# Altium PCB HF_Charger.PcbDoc
Units mil, origin at the board's own origin, x right, y up, seen from the top; angles counter-clockwise.
Board outline 11811.02 x 7874.02 mil, 2 copper layers (Top Layer, Bottom Layer); 114 components, 62 nets, 391 pads, 4 vias.
Unrouted connection lines stored in the file: 177.
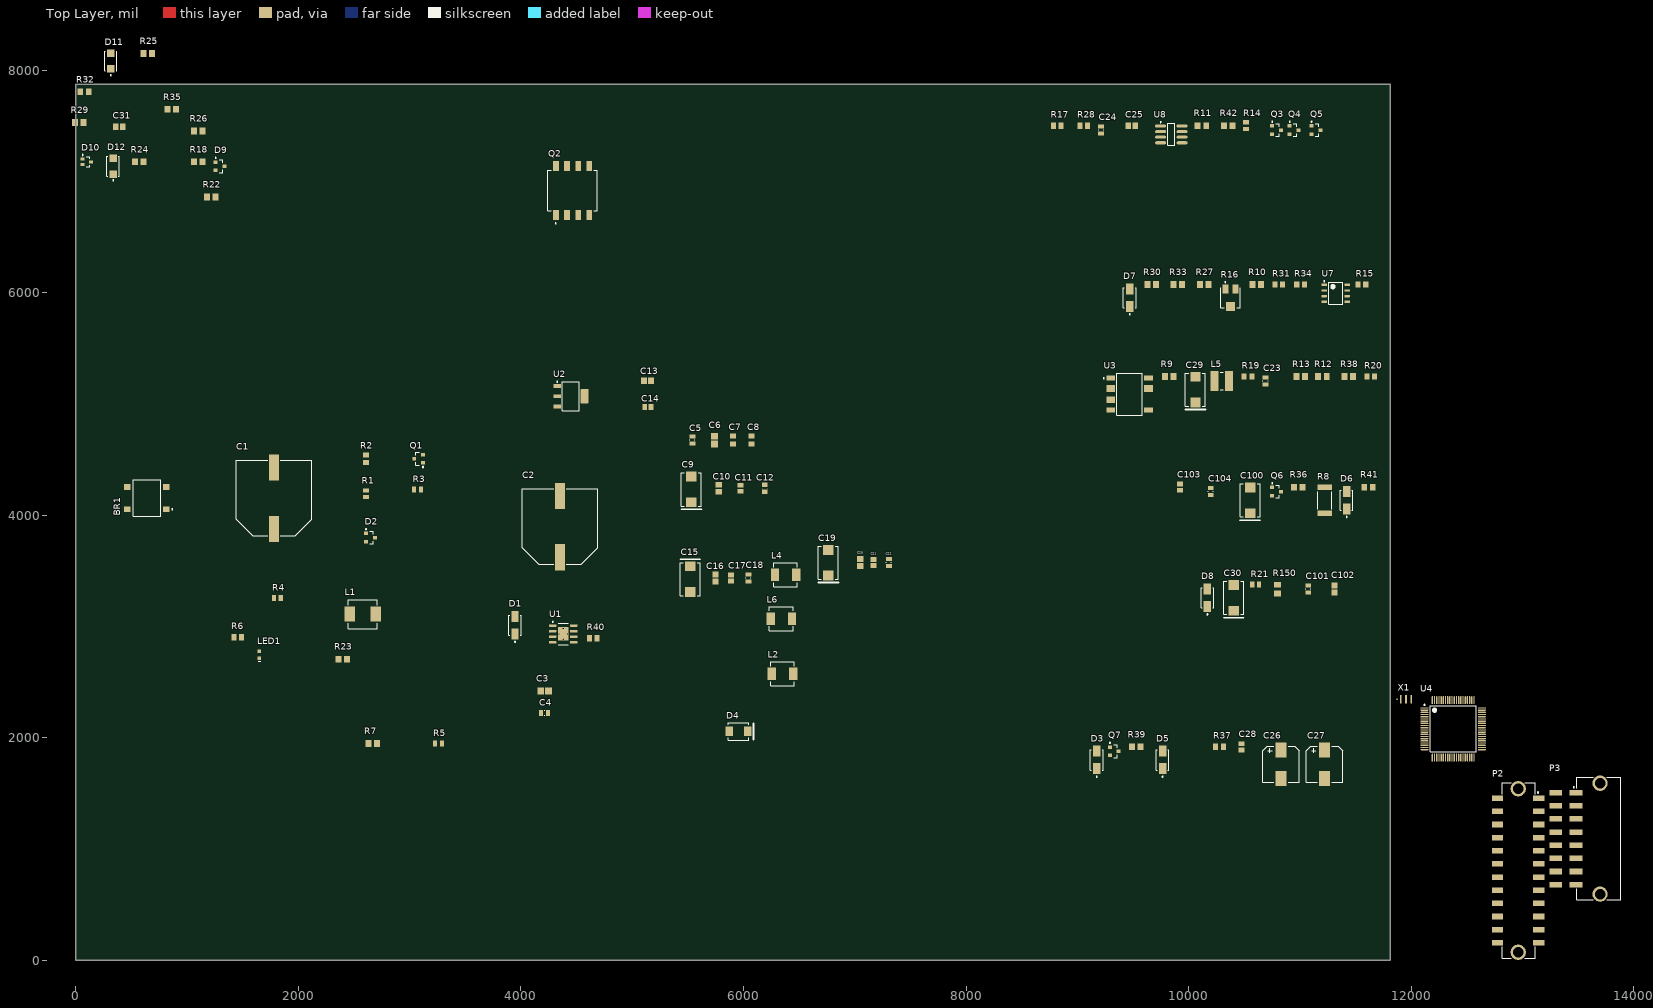
[diagram p0: Top Layer view]
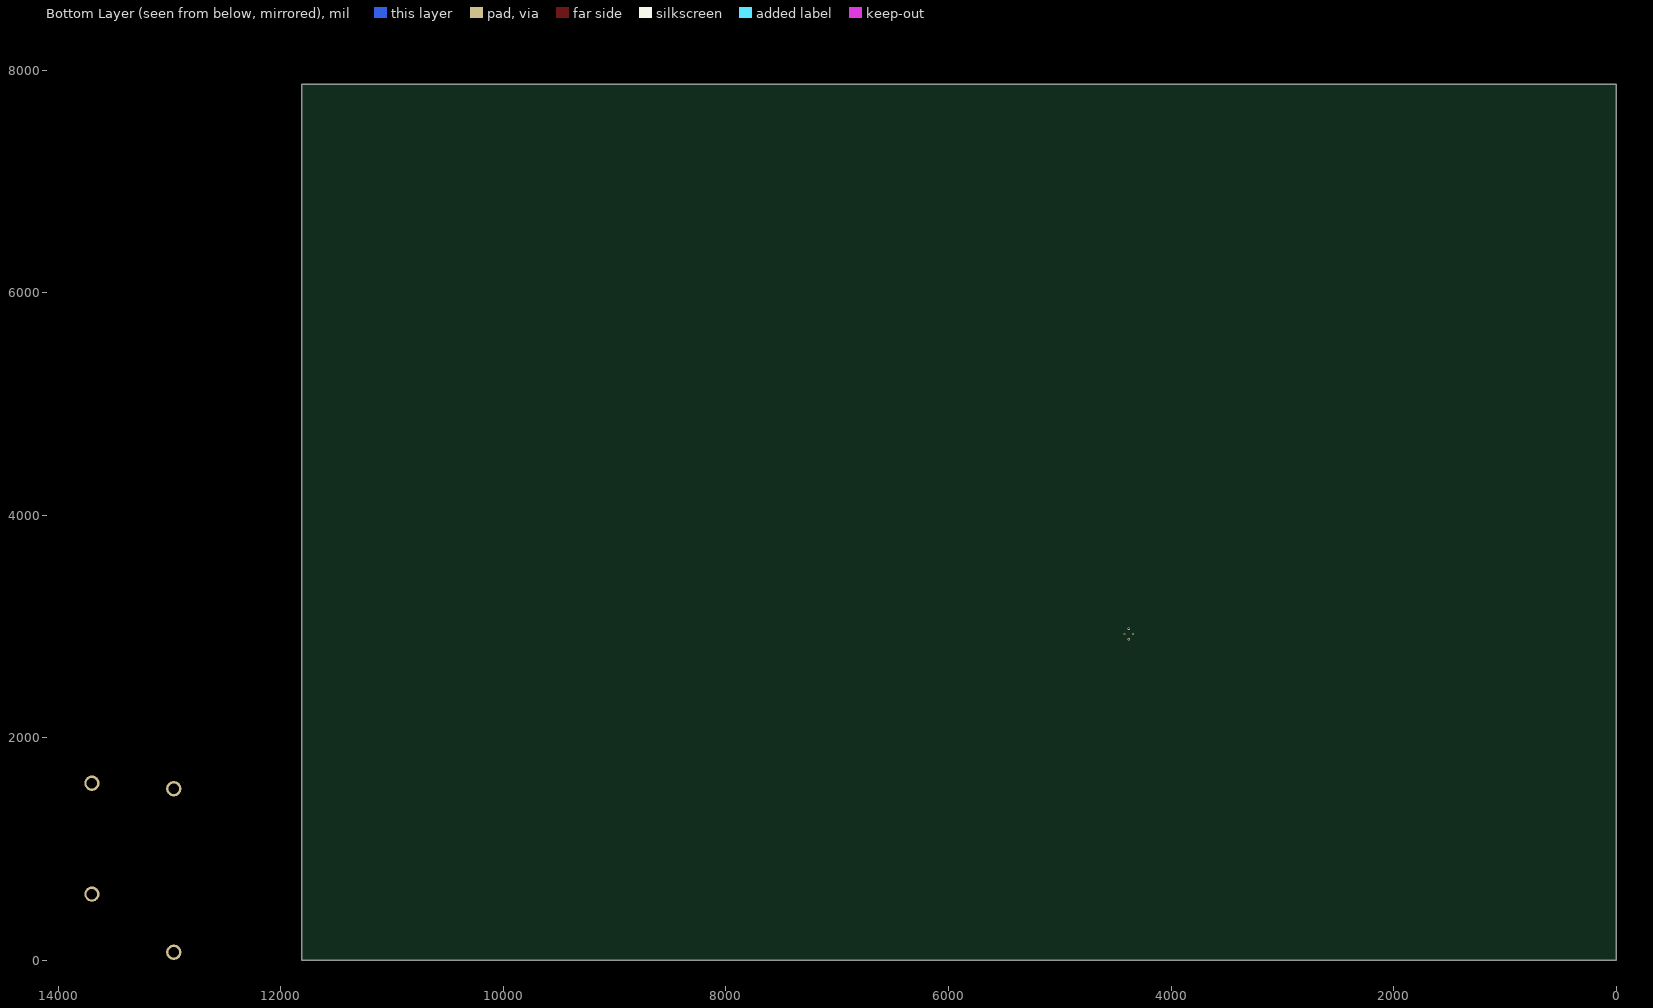
[diagram p1: Bottom Layer view, seen from below]

## Layer stack, top to bottom
Top Solder: solder mask 0.4, Solder Resist, Dk 3.5
Top Layer: signal copper 1.4
Dielectric 1: dielectric 12.6, FR-4, Dk 4.8
Bottom Layer: signal copper 1.4
Bottom Solder: solder mask 0.4, Solder Resist, Dk 3.5

## Board outline
0,0 11811.02,0 11811.02,7874.02 0,7874.02

## Design rules (kind name [scope] priority, off if disabled: settings)
Clearance [All] p1: gap=10 ignorepadtopadclearanceinfootprint=FALSE except(0: Arc-Hole Track-Hole SMDPad-Hole THPad-Hole Via-Hole Fill-Hole Poly-Hole Region-Hole Text-Hole)
PolygonConnect [All] p1: connectstyle=Relief reliefconductorwidth=10 reliefentries=4 polygonreliefangle="90 Angle" airgapwidth=10
RoomDefinition uprocessor [InComponentClass('uprocessor')] p1: confinementstyle=ConfineIn formatcopy=TRUE lockcomponents=FALSE outline 11854.31,1765.74 12690.92,1765.74 12690.92,2503.93 11854.31,2503.93
RoomDefinition power [InComponentClass('power')] p2: confinementstyle=ConfineIn formatcopy=TRUE lockcomponents=FALSE outline 11864.15,-35.43 12366.11,-35.43 12366.11,1716.53 11864.15,1716.53
RoutingVias [All] p1: holewidth=28 width=50 viastyle="Through Hole" minholewidth=28 minwidth=50 maxholewidth=28 maxwidth=50
SolderMaskExpansion [All] p1: expansion=4 istentingtop=FALSE
Width [All] p1: maxlimit=10 minlimit=10 preferedwidth=10
30 further rules are at their usual default settings.

## Classes and differential pairs
component class uprocessor: U4 X1

## Components (designator, comment, footprint, x,y, rotation, side; value= is the part's Value field where it differs from the comment)
BR1 "DF10S" FAIR-SDIP-4_V 639.76,4153.54 r90 top
C1 "470uF" PNSC-EEV-FK1J471M_L 1781.5,4153.54 r90 top
C2 "470uF" PNSC-EEV-FK1J471M_L 4350.39,3897.64 r90 top
C3 "220pF" CAPC2013X140X50ML20T25 4212.6,2421.26 r0 top
C4 "33nF" CAPC0805(2012)100_L 4212.6,2224.41 r0 top
C5 "33n" CAPC0805(2012)100_L 5541.34,4675.2 r270 top value=33nF
C6 "220p" CAPC2013X140X50ML20T25 5738.19,4675.2 r270 top
C7 "220u" CAPC2013X120X55NL10T10 5905.51,4675.2 r270 top
C8 "220u" CAPC2013X120X55NL10T10 6072.83,4675.2 r270 top
C9 "100u" KEMT-T495-D_L 5531.5,4232.28 r90 top
C10 "100n" CAPC2013X88X50NL20T25 5777.56,4242.13 r270 top
C11 "10n" CAPC2013X140X50LL20T25 5974.41,4242.13 r270 top
C12 "1n" CAPC0805(2012)145_L 6190.94,4242.13 r270 top value=1nF
C13 "100n" CAPC2013X88X50NL20T25 5137.8,5206.69 r180 top
C14 "10n" CAPC2013X140X50LL20T25 5139.76,4970.47 r180 top
C15 "100u" KEMT-T495-D_L 5521.65,3425.2 r270 top
C16 "100n" CAPC2013X88X50NL20T25 5748.03,3435.04 r90 top
C17 "10n" CAPC2013X140X50LL20T25 5885.83,3435.04 r90 top
C18 "1n" CAPC0805(2012)145_L 6043.31,3435.04 r90 top value=1nF
C19 "100u" KEMT-T495-D_L 6761.81,3572.83 r90 top
C20 "100n" CAPC2013X88X50NL20T25 7048.07,3574.72 r270 top
C21 "10n" CAPC2013X140X50LL20T25 7166.18,3575.71 r270 top
C22 "1n" CAPC0805(2012)145_L 7305.94,3574.72 r270 top value=1nF
C23 "1uF" CAPC0805(2012)145_L 10689.97,5206.69 r90 top
C24 "1uF" CAPC0805(2012)145_L 9213.59,7460.63 r90 top
C25 "100n" CAPC2013X88X50NL20T25 9489.18,7500 r0 top
C26 "4.7u 400V" NIC-ULR-8x10-2_V 10827.76,1761.81 r0 top
C27 "4.7u 400V" NIC-ULR-8x10-2_V 11221.46,1761.81 r0 top
C28 "10n" CAPC2013X140X50LL20T25 10473.43,1919.29 r90 top
C29 "10u 35V" KEMT-T491-D_L 10060.04,5127.95 r90 top
C30 "100u" KEMT-T491-D_L 10404.53,3257.87 r90 top
C31 "100n" CAPC2013X88X50NL20T25 390.74,7490.16 r0 top
C100 "100u" KEMT-T495-D_L 10552.17,4133.86 r90 top
C101 "1uF" CAPC0805(2012)145_L 11073.82,3336.61 r90 top
C102 "100n" CAPC2013X88X50NL20T25 11310.04,3336.61 r90 top
C103 "10n" CAPC2013X140X50LL20T25 9922.25,4251.97 r90 top
C104 "1n" CAPC0805(2012)145_L 10197.84,4212.6 r90 top value=1nF
D1 "RS1M-13-F" FP-SMA-MFG 3946.85,3011.81 r90 top value=15pF
D2 "BZX84C10LT1G" ONSC-SOT-23-3-318-08_V 2647.64,3799.21 r0 top
D3 "RS1M-13-F" FP-SMA-MFG 9174.21,1801.18 r90 top value=15pF
D4 "STPS2L25U" STM-SMB_P_V 5954.72,2057.09 r0 top
D5 "RS1M-13-F" FP-SMA-MFG 9764.76,1801.18 r90 top value=15pF
D6 "RS1M-13-F" FP-SMA-MFG 11418.31,4133.86 r90 top value=15pF
D7 "RS1M-13-F" FP-SMA-MFG 9469.49,5954.72 r90 top value=15pF
D8 "RS1M-13-F" FP-SMA-MFG 10168.31,3257.87 r90 top value=15pF
D9 "BAW56LT3G" ONSC-SOT-23-3-318-08_V 1296.26,7135.83 r0 top
D10 "M1MA142WKT1G" ONSC-SOT-323-3-419-04_V 99.41,7175.2 r0 top
D11 "ES1B-E3/61T" FP-95400-MFG 314.96,8080.71 r90 top value=10pF
D12 "ES1B-E3/61T" FP-95400-MFG 335.63,7135.83 r90 top value=10pF
L1 "22uH" FP-IHLP-2525CZ-FP_2_413x3-MFG 2578.74,3110.24 r0 top
L2 "10uH" FP-IHLP-2020BZ-FP_1_905x2-MFG 6350,2575 r0 top
L4 "10uH" FP-IHLP-2020BZ-FP_1_905x2-MFG 6377.95,3464.57 r0 top
L5 "SDR0403-102KL" BOUR-SDR0403-2_V 10296.26,5206.69 r0 top
L6 "10uH" FP-IHLP-2020BZ-FP_1_905x2-MFG 6340,3070 r0 top
LED1 "RED" 0603_A 1650.59,2746.06 r90 top
P2 "662024235922" 662024235922 12965.16,807.83 r90 top
P3 "662016230822" 662016230822 13681.97,1094.06 r90 top
Q1 "BC817" ONSC-SOT-23-3-318-08_V 3080.71,4507.87 r180 top
Q2 "HCNR201-500E" FP-HCNR201-500E-MFG 4464.57,6917.32 r90 top
Q3 "BC817" ONSC-SOT-23-3-318-08_V 10788.39,7460.63 r0 top
Q4 "BC817" ONSC-SOT-23-3-318-08_V 10945.87,7460.63 r0 top
Q5 "BC817" ONSC-SOT-23-3-318-08_V 11142.72,7460.63 r0 top
Q6 "BC817" ONSC-SOT-23-3-318-08_V 10788.39,4212.6 r0 top
Q7 "BC817" ONSC-SOT-23-3-318-08_V 9331.69,1879.92 r0 top
R1 "10k" RESC2013X70X40LL20T20 2608.27,4192.91 r270 top
R2 "22k" RESC2013X70X40NL20T20 2608.27,4507.87 r270 top
R3 "10k" RESC2013X70X40LL20T20 3070.87,4232.28 r0 top
R4 "4k7" RESC2013X70X40LL20T20 1811.02,3257.87 r0 top
R5 "6k8" RESC2013X70X40LL20T20 3258.86,1948.82 r0 top
R6 "2k7" RESC2013X70X40NL20T20 1456.69,2903.54 r0 top
R7 "470" RESC2013X70X40ML20T20 2668.31,1948.82 r0 top
R8 "82R 1% 2512" RESC2512(6432)_N 11221.46,4133.86 r90 top value="82.00 Ohm"
R9 "100k" RESC2013X70X40ML20T20 9823.82,5246.06 r0 top
R10 "100k" RESC2013X70X40ML20T20 10611.23,6072.83 r0 top
R11 "100k" RESC2013X70X40ML20T20 10119.1,7500 r0 top
R12 "10k" RESC2013X70X40ML20T20 11201.78,5246.06 r0 top
R13 "47k" RESC2013X70X40ML20T20 11004.93,5246.06 r0 top
R14 "100" RESC2013X70X40LL20T20 10512.8,7500 r90 top
R15 "22k" RESC2013X70X40NL20T20 11556.11,6072.83 r0 top
R16 "5k" BOUR-3314J-1_V 10375.01,5954.72 r0 top
R17 "22k" RESC2013X70X40NL20T20 8819.89,7500 r0 top
R18 "1k" RESC2013X70X40ML20T20 1099.4,7175.2 r0 top
R19 "2k" RESC2013X70X40NL20T20 10532.48,5246.06 r0 top
R20 "13k" RESC2013X70X40NL20T20 11634.85,5246.06 r0 top
R21 "3.3k" RESC2013X70X40LL20T20 10601.38,3375.98 r0 top
R22 "10k" RESC2013X70X40ML20T20 1217.52,6860.24 r0 top
R23 "10k" RESC2013X70X40ML20T20 2398.62,2706.69 r0 top
R24 "47k" RESC2013X70X40ML20T20 571.85,7175.2 r0 top
R25 "1k" RESC2013X70X40ML20T20 648.62,8149.61 r0 top
R26 "47k" RESC2013X70X40ML20T20 1099.41,7450.79 r0 top
R27 "10k" RESC2013X70X40ML20T20 10138.78,6072.83 r0 top
R28 "22k" RESC2013X70X40NL20T20 9056.11,7500 r0 top
R29 "10k" RESC2013X70X40ML20T20 30.51,7529.53 r0 top
R30 "10k" RESC2013X70X40ML20T20 9666.34,6072.83 r0 top
R31 "22k" RESC2013X70X40NL20T20 10808.08,6072.83 r0 top
R32 "10k" RESC2013X70X40ML20T20 78.74,7805.12 r0 top
R33 "10k" RESC2013X70X40ML20T20 9902.56,6072.83 r0 top
R34 "22k" RESC2013X70X40NL20T20 11004.93,6072.83 r0 top
R35 "10k" RESC2013X70X40ML20T20 863.18,7647.64 r0 top
R36 "10k" RESC2013X70X40ML20T20 10985.24,4251.97 r0 top
R37 "22k" RESC2013X70X40NL20T20 10276.58,1919.29 r0 top
R38 "1k" RESC2013X70X40ML20T20 11438,5246.06 r0 top
R39 "10k" RESC2013X70X40ML20T20 9528.54,1919.29 r0 top
R40 "22k" RESC2013X70X40NL20T20 4650.59,2893.7 r0 top
R41 "1k" RESC2013X70X40ML20T20 11615.16,4251.97 r0 top
R42 "1k" RESC2013X70X40ML20T20 10355.32,7500 r0 top
R150 "10k" RESC2013X70X40ML20T20 10798.23,3336.61 r90 top
U1 "L5973D" HSO-8_L 4379.92,2933.07 r0 top
U2 "LM1117MP-3.3/NOPB" DCY0004A_N 4448.82,5068.9 r0 top
U3 "LNK305GN" PI-SMD-8B-7_V 9469.49,5088.58 r0 top
U4 "PIC24FJ256GB108T-I/PT" TQFP-PT80_N 12375.96,2080.7 r0 top
U7 "LM358DR" D0008A_L 11319.89,5994.09 r0 top
U8 "MCP6002-I/SN" SOIC-SN8_M 9843.51,7421.26 r0 top
X1 "CSTCE12M0G55Z-R0" MURA-CSTCE_G_V 11952.73,2346.45 r0 top

## Footprints (in the part's own frame and the unit in brackets; to place one, negate y for a bottom-side part, rotate by r counter-clockwise, add the part's x,y. Pads: shape width x height; smd on the part's side, far side on the other; paste and mask are expansions set on the pad)
0603_A [mm] "Chip LED, 2-Leads, Body 1.6x0.8mm, IPC Medium Density"
  rect 0.8x0.8 smd: 1(-0.8,0) 2(0.8,0)
  silkscreen extent -1.5,-0.3 -1.5,0.3, body extent -0.8,-0.4 0.8,0.4, height 0.7
662016230822 [mm] "Dual row SMT Right angle header With TH Metal Clip 16p"
  rect 1.27x2.92 smd: 1(10.5,5.13) 2(7.5,5.13) 3(4.5,5.13) 4(1.5,5.13) 5(-1.5,5.13) 6(-4.5,5.13) 7(-7.5,5.13) 8(-10.5,5.13) 9(10.5,9.75) 10(7.5,9.75) 11(4.5,9.75) 12(1.5,9.75) 13(-1.5,9.75) 14(-4.5,9.75) 15(-7.5,9.75) 16(-10.5,9.75)
  round 3.5 hole 2.41: MH1(-12.66,-0.35) MH2(12.66,-0.35)
  silkscreen extent -14,-5.02 14,5.75, body extent -13.85,-4.95 13.85,10.95, height 8.78
662024235922 [mm] "Dual row SMT Vertical header With TH metal clip 24p"
  rect 1.27x2.54 smd: 1(16.5,-4.57) 2(13.5,-4.57) 3(10.5,-4.57) 4(7.5,-4.57) 5(4.5,-4.57) 6(1.5,-4.57) 7(-1.5,-4.57) 8(-4.5,-4.57) 9(-7.5,-4.57) 10(-10.5,-4.57) 11(-13.5,-4.57) 12(-16.5,-4.57) 13(16.5,4.83) 14(13.5,4.83) 15(10.5,4.83) 16(7.5,4.83) 17(4.5,4.83) 18(1.5,4.83) 19(-1.5,4.83) 20(-4.5,4.83) 21(-7.5,4.83) 22(-10.5,4.83) 23(-13.5,4.83) 24(-16.5,4.83)
  round 3.5 hole 2.41: MH1(-18.66,0.13) MH2(18.66,0.13)
  silkscreen extent -20,-4.52 20,3.75, body extent -19.85,-5.45 19.85,5.95, height 9.92
BOUR-3314J-1_V [mm] "SMD, 3-Leads, Body 4.5x4.5mm, Pitch 1.15mm"
  rect 1.3x2 smd: 1(-1.15,2) 3(1.15,2)
  rect 2x2 smd: 2(0,-2)
  silkscreen extent -2.25,-2.25 2.25,3.67, body extent -2.5,-2.5 2.5,2.5, height 2.72
BOUR-SDR0403-2_V [mm] "SMD, 2-Leads, Dia 4.5mm, Height 3.5mm"
  rect 1.8x4.5 smd: 1(-1.65,0) 2(1.65,0)
  silkscreen extent -0.35,-2 0.35,2, body extent -2.25,-2 2.25,2, height 3.5
CAPC0805(2012)100_L [mm] "Chip Capacitor, Body 2.0x1.2mm, Height 1.0mm, IPC High Density"
  rect 0.95x1.35 smd: 1(-0.8,0) 2(0.8,0)
  silkscreen extent -0.05,-0.58 0.05,0.58, body extent -1.1,-0.72 1.1,0.72, height 1
CAPC0805(2012)145_L [mm] "Chip Capacitor, Body 2.0x1.2mm, Height 1.45mm, IPC High Density"
  rect 0.95x1.35 smd: 1(-0.8,0) 2(0.8,0)
  silkscreen extent -0.05,-0.58 0.05,0.58, body extent -1.1,-0.72 1.1,0.72, height 1.45
CAPC2013X88X50NL20T25 [mm] "Chip Capacitor, 2-Leads, Body 2.00x1.25mm, IPC Medium Density"
  rect 1.3x1.45 smd: 1(-0.8,0) 2(0.8,0)
  body extent -1.1,-0.72 1.1,0.72, height 0.88
CAPC2013X120X55NL10T10 [mm] "Chip Capacitor, 2-Leads, Body 2.00x1.25mm, IPC Medium Density"
  rect 1.15x1.4 smd: 1(-0.875,0) 2(0.875,0)
  body extent -1.05,-0.67 1.05,0.67, height 1.2
CAPC2013X140X50LL20T25 [mm] "Chip Capacitor, 2-Leads, Body 2.00x1.25mm, IPC High Density"
  rect 1.1x1.35 smd: 1(-0.7,0) 2(0.7,0)
  body extent -1.1,-0.72 1.1,0.72, height 1.4
CAPC2013X140X50ML20T25 [mm] "Chip Capacitor, 2-Leads, Body 2.00x1.25mm, IPC Low Density"
  rect 1.5x1.55 smd: 1(-0.9,0) 2(0.9,0)
  body extent -1.1,-0.72 1.1,0.72, height 1.4
D0008A_L [mm] "SOIC, 8-Leads, Body 5x4mm, Pitch 1.27mm, IPC High Density"
  rrect18% 1.25x0.55 smd: 1(-2.625,1.905) 2(-2.625,0.635) 3(-2.625,-0.635) 4(-2.625,-1.905) 5(2.625,-1.905) 6(2.625,-0.635) 7(2.625,0.635) 8(2.625,1.905)
  silkscreen extent -2.75,-2.5 1.6,2.85, body extent -3,-2.45 3,2.45, height 1.63
DCY0004A_N [mm] "SOT223, 4-Leads, Body 6.7x3.7mm, Pitch 2.3mm, IPC Medium Density"
  rrect11% 1.75x0.9 smd: 1(-3.125,2.3) 2(-3.125,0) 3(-3.125,-2.3)
  rrect6% 1.75x3.2 smd: 4(3.125,0)
  silkscreen extent -3.25,-3.35 1.95,3.42, body extent -3.5,-3.25 3.5,3.25, height 1.62
FAIR-SDIP-4_V [mm] "SMD, 4-Leads, Body 8.28x6.35mm, Pitch 5.1mm"
  rect 1.3x1.5 smd: 1(-2.55,-4.45) 2(2.55,-4.45) 3(2.55,4.45) 4(-2.55,4.45)
  silkscreen extent -4.14,-5.88 4.14,3.18, body extent -4.14,-3.18 4.14,3.18, height 2.84
FP-95400-MFG [mm]
  rect 1.7x1.68 smd paste+0 mask+0: 1(-1.79,0) 2(1.79,0)
  silkscreen extent -3.32,-1.4 2.25,1.4, body extent -2.74,-1.5 2.74,1.5, height 0.25
FP-HCNR201-500E-MFG [mm]
  rect 2.29x1.3 smd paste+0 mask+0: 1(-5.635,3.81) 2(-5.635,1.27) 3(-5.635,-1.27) 4(-5.635,-3.81) 5(5.635,-3.81) 6(5.635,-1.27) 7(5.635,1.27) 8(5.635,3.81)
  silkscreen extent -7.62,-5.65 4.57,5.65, body extent -6.88,-5.75 6.88,5.75, height 0.25
FP-IHLP-2020BZ-FP_1_905x2-MFG [mm]
  rect 1.905x2.79 smd paste+0 mask+0: 1(-2.425,0) 2(2.425,0)
  silkscreen extent -2.72,-2.72 2.72,2.72, body extent -3.48,-2.82 3.48,2.82, height 0.25
FP-IHLP-2525CZ-FP_2_413x3-MFG [mil]
  rect 95x135 smd paste+0 mask+0: 1(-115,0) 2(115,0)
  silkscreen extent -132,-132 132,132, body extent -166,-136 166,136, height 10
FP-SMA-MFG [mm]
  rect 2.5x1.7 smd paste+0 mask+0: 1(-2,0) 2(2,0)
  silkscreen extent -3.92,-1.46 2.3,1.46, body extent -3.35,-1.56 3.35,1.56, height 0.25
HSO-8_L [mm] "SOIC, 8-Leads, Body 4.9x3.9mm, Pitch 1.27mm, Thermal Pad, IPC High Density"
  oval 1.8x0.6 smd: 1(-2.4,1.905) 2(-2.4,0.635) 3(-2.4,-0.635) 4(-2.4,-1.905) 5(2.4,-1.905) 6(2.4,-0.635) 7(2.4,0.635) 8(2.4,1.905)
  rect 2.4x3.1 smd paste-1.2: 9(0,0)
  silkscreen extent -2.47,-2.5 1.1,2.88, body extent -2,-2.5 2,2.5, height 1.75
KEMT-T491-D_L [mm] "Molded Capacitor, 2-Leads, Body 7.60x4.60mm, IPC High Density"
  rect 2.2x2.35 smd: 1(-2.925,0) 2(2.925,0)
  silkscreen extent -4.52,-2.3 3.8,2.3, body extent -3.8,-2.3 3.8,2.3, height 3.1
KEMT-T495-D_L [mm] "Molded Capacitor, 2-Leads, Body 7.6x4.6mm, IPC High Density"
  rect 2.2x2.35 smd: 1(-2.925,0) 2(2.925,0)
  silkscreen extent -4.52,-2.3 3.8,2.3, body extent -4.02,-2.3 4.02,2.3, height 3.1
MURA-CSTCE_G_V [mm] "SMD, 3-Leads, Body 3.2x1.3mm, Pitch 1.2mm"
  rect 0.4x2 smd: 1(-1.2,0) 2(0,0) 3(1.2,0)
  silkscreen extent -2.1,-0.05 -2,0.05, body extent -1.6,-0.65 1.6,0.65, height 0.7
NIC-ULR-8x10-2_V [mm] "SMD, 2-Leads,Body 8.3x8.3mm, Height 11mm"
  rect 2.5x3.5 smd: 1(0,3.25) 2(0,-3.25)
  silkscreen extent -4.15,-4.15 4.15,4.15, body extent -4.15,-4.45 4.15,4.45, height 11
ONSC-SOT-23-3-318-08_V [mm] "SOT23, 3-Leads, Body 2.92x1.3mm, Pitch 0.95mm"
  rect 0.9x0.8 smd: 1(-1,0.95) 2(-1,-0.95) 3(1,0)
  silkscreen extent -1.12,-1.46 0.65,2.02, body extent -0.65,-1.46 0.65,1.46, height 1.11
ONSC-SOT-323-3-419-04_V [mm] "SOT23, 3-Leads, Body 2x1.25mm, Pitch 0.65mm"
  rect 0.9x0.7 smd: 1(-0.95,0.65) 2(-0.95,-0.65) 3(0.95,0)
  silkscreen extent -1.07,-1.1 0.63,1.67, body extent -0.63,-1 0.63,1, height 1
PI-SMD-8B-7_V [mil] "SMD, 7-Leads, Body 9.575x6.35mm"
  rect 80x46 smd: 1(-170,143) 4(-170,-143) 5(170,-143) 8(170,143)
  rect 80x60 smd: 2(-170,50) 3(-170,-50) 7(170,50)
  silkscreen extent -237,-188 114,188, body extent -193,-194 193,194, height 157
PNSC-EEV-FK1J471M_L [mm] "CAPAE, 2-Leads, Body 17.2x17.2mm, IPC High Density"
  rect 5.95x2.3 smd: 1(-7,0) 2(7,0)
  silkscreen extent -8.6,-8.6 8.6,8.6, body extent -9.5,-8.6 9.5,8.6, height 17
RESC2013X70X40LL20T20 [mm] "Chip Resistor, 2-Leads, Body 2.00x1.25mm, IPC High Density"
  rect 0.95x1.35 smd: 1(-0.775,0) 2(0.775,0)
  body extent -1.1,-0.72 1.1,0.72, height 0.7
RESC2013X70X40ML20T20 [mm] "Chip Resistor, 2-Leads, Body 2.00x1.25mm, IPC Low Density"
  rect 1.35x1.55 smd: 1(-0.975,0) 2(0.975,0)
  body extent -1.1,-0.72 1.1,0.72, height 0.7
RESC2013X70X40NL20T20 [mm] "Chip Resistor, 2-Leads, Body 2.00x1.25mm, IPC Medium Density"
  rect 1.15x1.45 smd: 1(-0.875,0) 2(0.875,0)
  body extent -1.1,-0.72 1.1,0.72, height 0.7
RESC2512(6432)_N [mm] "Chip Resistor, Body 6.4x3.2mm, IPC Medium Density"
  rect 1.25x3.35 smd: 1(-3,0) 2(3,0)
  silkscreen extent -2,-1.57 2,1.58, body extent -3.25,-1.7 3.25,1.7, height 0.75
SOIC-SN8_M [mm] "SOIC, 8-Leads, Body 4.9x3.9mm, Pitch 1.27mm, IPC Low Density"
  oval 2.5x0.7 smd: 1(-2.45,1.905) 2(-2.45,0.635) 3(-2.45,-0.635) 4(-2.45,-1.905) 5(2.45,-1.905) 6(2.45,-0.635) 7(2.45,0.635) 8(2.45,1.905)
  silkscreen extent -2.57,-2.5 0.8,2.93, body extent -2,-2.5 2,2.5, height 1.75
STM-SMB_P_V [mm] "SMB, 2-Leads, Body 4.325x3.625mm"
  rect 1.62x2.18 smd: 1(-2.11,0) 2(2.11,0)
  silkscreen extent -2.3,-1.97 3.42,1.97, body extent -2.16,-1.81 2.16,1.81, height 2.59
TQFP-PT80_N [mm] "Thin QFP, 80-Leads, Body 12x12mm, Pitch 0.5mm, IPC Medium Density"
  oval 1.8x0.3 smd: 1(-6.55,4.75) 2(-6.55,4.25) 3(-6.55,3.75) 4(-6.55,3.25) 5(-6.55,2.75) 6(-6.55,2.25) 7(-6.55,1.75) 8(-6.55,1.25) 9(-6.55,0.75) 10(-6.55,0.25) 11(-6.55,-0.25) 12(-6.55,-0.75) 13(-6.55,-1.25) 14(-6.55,-1.75) 15(-6.55,-2.25) 16(-6.55,-2.75) 17(-6.55,-3.25) 18(-6.55,-3.75) 19(-6.55,-4.25) 20(-6.55,-4.75) 41(6.55,-4.75) 42(6.55,-4.25) 43(6.55,-3.75) 44(6.55,-3.25) 45(6.55,-2.75) 46(6.55,-2.25) 47(6.55,-1.75) 48(6.55,-1.25) 49(6.55,-0.75) 50(6.55,-0.25) 51(6.55,0.25) 52(6.55,0.75) 53(6.55,1.25) 54(6.55,1.75) 55(6.55,2.25) 56(6.55,2.75) 57(6.55,3.25) 58(6.55,3.75) 59(6.55,4.25) 60(6.55,4.75)
  oval 0.3x1.8 smd: 21(-4.75,-6.55) 22(-4.25,-6.55) 23(-3.75,-6.55) 24(-3.25,-6.55) 25(-2.75,-6.55) 26(-2.25,-6.55) 27(-1.75,-6.55) 28(-1.25,-6.55) 29(-0.75,-6.55) 30(-0.25,-6.55) 31(0.25,-6.55) 32(0.75,-6.55) 33(1.25,-6.55) 34(1.75,-6.55) 35(2.25,-6.55) 36(2.75,-6.55) 37(3.25,-6.55) 38(3.75,-6.55) 39(4.25,-6.55) 40(4.75,-6.55) 61(4.75,6.55) 62(4.25,6.55) 63(3.75,6.55) 64(3.25,6.55) 65(2.75,6.55) 66(2.25,6.55) 67(1.75,6.55) 68(1.25,6.55) 69(0.75,6.55) 70(0.25,6.55) 71(-0.25,6.55) 72(-0.75,6.55) 73(-1.25,6.55) 74(-1.75,6.55) 75(-2.25,6.55) 76(-2.75,6.55) 77(-3.25,6.55) 78(-3.75,6.55) 79(-4.25,6.55) 80(-4.75,6.55)
  silkscreen extent -6.67,-5.25 5.25,5.57, body extent -6,-6 6,6, height 1.2

## Part data
BR1: library part CMP-2000-06153-1, "Bridge Rectifier, 1.5 A, 1000 V, 4-Pin SDIP, RoHS, Tape and Reel", Manufacturer=FairchildSemiconductor, Operating Temperature=-55to150°C, Package=4SDIPSMD, Package Description="4-Pin Surface Mount Device, Body 8.28 x 6.35 mm, Pitch 5.1 mm", Package Reference="SDIP 4L", Peak Average Forward Current=1.5@Ta=40CA, Peak Forward Voltage=1.1@1AV, Peak Reverse Current=5uA, Peak Reverse Repetitive Voltage=1000V, Bridge Type=SinglePhase, Category=BridgeRectifier, Configuration=Single, Datasheet URL=http://www.farnell.com/datasheets/1941063.pdf, Datasheet Version="Rev. 1.5, 05/2015", Manufacturer URL=https://www.fairchildsemi.com/, Mounting=SurfaceMount, Mounting Technology=SurfaceMount, Packaging=Tape&Reel
C1 C2: library part CMP-1665-00018-3, "Aluminum Electrolytic Capacitor (SMD Type), 470 uF, 63 V, -55 to 105 degC, 2-Pin CAPAE, RoHS, Tape and Reel", Manufacturer=Panasonic, Max Operating Temperature="105 degC", Min Operating Temperature="-55 degC", Package Quantity=125, Voltage Rating="63 V", ComponentLink1Description="Manufacturer URL", ComponentLink1URL=http://www.panasonic.com/, ComponentLink2Description=Datasheet, ComponentLink2URL=https://industrial.panasonic.com/cdbs/www-data/pdf/RDE0000/ABA0000C1181.pdf, DatasheetVersion=03/2016, Height="16.5 mm", Length="17 mm", Mount="Surface Mount", Mounting Technology="Surface Mount", PackageDescription="2-Pin Electrolytic Aluminum Capacitor, Body 17 x 17 mm", PackageReference=EEV-FK1J471M, Packaging="Tape and Reel", Pins=2, REACH SVHC=Unknown, RoHSCompliant=true
C3 C6: library part CMP-2007-04624-1, Manufacturer="AVX Interconnect / Elco", Part Number=08055A221JAT2A
C4 C5: library part CMP-1036-04167-1, "CAP 33nF 50V ±5% 0805 (2012 Metric) Thickness 1mm SMD", Case-EIA=0805, Case-Metric=2012, Rated Voltage="50 V", Tolerance=Â±5%, Max Thickness="1 mm", Technology=SMT
C7 C8: library part CMP-2007-03638-1, Manufacturer=Kemet, Part Number=T488R227M004AAE2K0
C9 C15 C19 C100: library part CMP-2000-07207-1, "Capacitor, Tantalum, 100 uF, +/- 10%, 16 V, -55 to 125 degC, 2-Pin SMD, RoHS, Tape and Reel", Capacitance=100000000pF, Case Code=D, Case Style=Molded, Manufacturer=Kemet, Operating Temp Range=-55Cto125C, Package / Case=7343-31, Package Description="2-Pin Surface Mount Device, Body 7.3 x 4.3 mm", Package Reference=T495-D, Tolerance (+ or -)=10%, Voltage=16VDC, Construction=SMTChip, Datasheet URL=http://capacitoredge.kemet.com/capedge2/DataSheet/Datasheet-T495D107K016ATE125.pdf?pn=T495D107K016ATE125, Datasheet Version=09/2016, DCL=16uA, DF=8%, ESR=0.125ohm, Failure Rate=NotRequired, Insulation=NotRequired, Lead Spacing (nom)=NotRequiredmm, Length W/Weld=NotRequiredmm, Length W/Weld (max)=NotRequiredmm, Manufacturer URL=http://www.kemet.com/, Mounting Style=SurfaceMount, Mounting Technology=SurfaceMount, Packaging=TapeandReel, Polarity=Polar, Product Depth (mm)=4.3mm, Product Diameter (mm)=NotRequiredmm, Product Height (mm)=2.8mm, Product Length (mm)=7.3mm, Rad Hardened=No, Seal=NotRequired, Seated Plane Height=NotRequiredmm, Wire Form=NotRequired
C10 C13 C16 C20 C25 C31 C102: library part CMP-2007-00279-1, Manufacturer=Kemet, Part Number=C0805C104K5RACTU
C11 C14 C17 C21 C28 C103: library part CMP-2007-04788-1, Manufacturer="AVX Interconnect / Elco", Part Number=08055F103KAT2A
C12 C18 C22 C104: library part CMP-1036-02979-1, "CAP 1nF 50V ±10% 0805 (2012 Metric) Thickness 1.45mm SMD", Case-EIA=0805, Case-Metric=2012, Rated Voltage="50 V", Tolerance=Â±10%, Max Thickness="1.45 mm", Technology=SMT
C23 C24 C101: library part CMP-1036-04761-1, "CAP 1uF 50V ±10% 0805 (2012 Metric) Thickness 1.45mm SMD", Case-EIA=0805, Case-Metric=2012, Rated Voltage="50 V", Tolerance=Â±10%, Max Thickness="1.45 mm", Technology=SMT
C26 C27: library part CMP-0952-00001-1, "Aluminum Electrolytic Capacitor, High Voltage, 4.7 uF +/- 20%, 400 V, -40 to 105 degC, 2-Pin 8.3 x 8.3 x 11 mm SMD, RoHS, Reel", Capacitance Tolerance="+/- 20%", Category Temperature Range="-40 to 105 degC", Manufacturer=Nichicon, PartNumber=ULR2G4R7MNL1GS, Rated Capacitance="4.7 uF", Rated Voltage="400 V", ComponentLink1Description="Manufacturer URL", ComponentLink1URL=http://www.nichicon.co.jp/, ComponentLink2Description=Datasheet, ComponentLink2URL=http://www.nichicon.co.jp/english/products/pdfs/e-lr.pdf, Mounting Technology="Surface Mount", PackageDescription="2-Pin SMD,Body 8.3 x 8.3 mm, Height 11 mm", PackageReference=ULR-8x10-2, Packing=Tape, Polarity Type=Polar, RoHS=TRUE
C29: library part CMP-2000-07580-1, "Tantalum Capacitor, 10 uF, +/- 10%, 35 V, -55 to 125 degC, 2-Pin SMD, RoHS, Tape and Reel", Capacitance=10uF, Case Code (Imperial)=2917, Case Code (Metric)=7343, Dielectric Material=Tantalum, ESR (Equivalent Series Resistance)=1Ohm, Leakage Current=3.5uA, Manufacturer=Kemet, Max Operating Temperature=125degC, Min Operating Temperature=-55degC, Package Description="2-Pin Surface Mount Device, Body 7.3 x 4.3 mm", Package Quantity=1, Package Reference=T491-D, Tolerance=20%, Voltage=35V, Case\/Package=2917, Datasheet URL=http://www.kemet.com/Lists/ProductCatalog/Attachments/254/KEM_T2005_T491.pdf, Datasheet Version=07/2017, Depth=4.3mm, Dissipation Factor=6%, Height=2.8mm, Height - Seated (Max)=0.122inch, Lead Free=LeadFree, Length=7.3mm, Life (Hours)=2000Hour, Manufacturer URL=http://www.kemet.com/, Mount=PCB, Mounting Technology=SurfaceMount, Number of Pins=2, Packaging=TapeandReel, Polarity=Polar, Radiation Hardening=No, REACH SVHC=NoSVHC, RoHSCompliant=True, Termination=SMD/SMT, Voltage Rating=35V, Voltage Rating (DC)=35V, Width=4.3mm
C30: library part CMP-2000-07541-1, "Tantalum Surface Mount Capacitor, 100 uF, +/- 10%, 16 V, -55 to 125 degC, 2917 (7343 Metric), RoHS, Tape and Reel", Capacitance=100uF, Case Code (Imperial)=2917, Case Code (Metric)=7343, Case\/Package=Molded, Dielectric Material=Tantalum, ESR (Equivalent Series Resistance)=700mOhm, Leakage Current=16uA, Manufacturer=Kemet, Max Operating Temperature=125degC, Min Operating Temperature=-55degC, Package Description="2-Pin Surface Mount Device, Body 7.3 x 4.3 mm", Package Quantity=1, Package Reference=T491-D, Ripple Current=463mA, Tolerance=10%, Voltage=16V, Datasheet URL=http://www.kemet.com/Lists/ProductCatalog/Attachments/254/KEM_T2005_T491.pdf, Datasheet Version=07/2017, Depth=4.3mm, Dissipation Factor=8%, Height=2.8mm, Height - Seated (Max)=0.122inch, Lead Free=LeadFree, Lead Pitch=3.6mm, Length=7.3mm, Life (Hours)=2000Hour, Manufacturer URL=http://www.kemet.com/, Mount=PCB, Mounting Technology=SurfaceMount, Packaging=TapeandReel, Polarity=Polar, Radiation Hardening=No, REACH SVHC=NoSVHC, RoHSCompliant=true, Termination=SMD/SMT, Voltage Rating=16V, Voltage Rating (DC)=16V, Weight=0.023634oz, Width=4.3mm
D1 D3 D5 D6 D7 D8: library part CMP-12791-000020-1, "DIODE GEN PURP 1KV 1A SMA", Capacitance=15pF, Forward Current=1A, Manufacturer="Diodes Inc.", Max Junction Temp=+150°C, Max Repetitive Reverse Voltage=1000V, Max Surge Forward Current=30A, Package=SMA, Peak Reverse Current=5uA, Temperature="-65°C to +150°C", Temperature Range Low=-65°C, Automotive=No, Category=Diode, ComponentLink2Description=Datasheet, ComponentLink2URL=https://www.diodes.com/assets/Datasheets/ds15002.pdf, Device Class L1="Discrete Semiconductors", Device Class L2=Diodes, Device Class L3="Rectifier Diodes", Digikey Description="DIODE GEN PURP 1KV 1A SMA", Footprint Url=https://www.diodes.com/assets/Package-Files/SMA.pdf, Height=2.4mm, Lead Free=Yes, Manufacturer Part Number=RS1M-13-F, Mouser Description="Rectifiers 1.0A 1000V", Octopart=https://octopart.com/rs1m-13-f-diodes+inc.-333072, Reverse Voltage=1000V, RoHS=TRUE, Standoff Height=0.05mm, Temperature Range High=+150°C
D2: library part CMP-1060-00877-1, "Zener Voltage Regulator, 225 mW, 3-Pin SOT-23, Pb-Free, Tape and Reel", Manufacturer="On Semiconductor", ComponentLink1Description="Manufacturer URL", ComponentLink1URL=http://www.onsemi.com/, ComponentLink2Description=Datasheet, ComponentLink2URL=http://www.onsemi.com/pub_link/Collateral/BZX84C2V4LT1-D.PDF, ComponentLink3Description="Package Specification", ComponentLink3URL=http://www.onsemi.cn/pub_link/Collateral/318-08.PDF, DatasheetVersion="Rev. 17", Mounting Technology="Surface Mount", PackageDescription="3-Pin Small Outline Transistor, Body 2.92 x 1.3 mm, Pitch 0.95 mm", PackageReference=SOT-23-3-318-08, PackageVersion="Rev. AP, 11/2009", Packing="Tape and Reel", PartNumber=BZX84C10LT1G, RoHS=Pb-Free
D4: library part CMP-2000-07176-1, "Low Drop Power Schottky Rectifier, 2 A, 25 V, 2-Pin SMD (SMB), RoHS, Tape and Reel", Capacitance @ Vr, F=-, Current - Average Rectified (Io)=2A, Current - Reverse Leakage @ Vr=90µA@25V, Manufacturer=STMicroelectronics, Operating Temperature - Junction=150°C(Max), Package / Case=DO-214AA,SMB, Package Description="2-Pin Surface Mount Device, Body 4.325 x 3.625 mm", Package Reference=SMB_P, Standard Package=1, Supplier Device Package=SMB, Voltage - DC Reverse (Vr) (Max)=25V, Voltage - Forward (Vf) (Max) @ If=450mV@2A, Category=DiscreteSemiconductorProducts, Datasheet URL=http://www.st.com/content/ccc/resource/technical/document/datasheet/f9/71/8b/51/48/04/4b/9b/CD00001325.pdf/files/CD00001325.pdf/jcr:content/translations/en.CD00001325.pdf, Datasheet Version=02/2007, Diode Type=Schottky, Family=Diodes,Rectifiers-Single, Manufacturer URL=http://www.st.com/, Mounting Technology=SurfaceMount, Mounting Type=SurfaceMount, Online Catalog=SchottkyDiode, Other Names=497-5573-6, Other Related Documents=STPS2L25ViewAllSpecifications, Package URL=http://www.st.com/st-web-ui/static/active/en/resource/technical/document/datasheet/CD00279657.pdf, Packaging=Digi-Reel®, Reverse Recovery Time (trr)=-, Series=-, Speed=FastRecovery=200mA(Io)
D9: library part CMP-1054-00110-1, "Dual Switching Diodes, Common Anode, 3-Pin SOT-23, Pb-Free, Tape and Reel", Manufacturer="On Semiconductor", ComponentLink1Description="Manufacturer URL", ComponentLink1URL=http://www.onsemi.com/, ComponentLink2Description=Datasheet, ComponentLink2URL=http://www.onsemi.cn/pub_link/Collateral/BAW56LT1-D.PDF, ComponentLink3Description="Package Specification", ComponentLink3URL=http://www.onsemi.cn/pub_link/Collateral/318-08.PDF, Configuration="Common Anode", DatasheetVersion="Rev. 8", IF Max (A)=0.2, Mounting Technology="Surface Mount", PackageDescription="3-Pin Small Outline Transistor, Body 2.92 x 1.3 mm, Pitch 0.95 mm", PackageReference=SOT-23-3-318-08, PackageVersion="Rev. AP, 11/2009", Packing="Tape and Reel", PartNumber=BAW56LT3G, RoHS=TRUE, trr Max (ns)=6
D10: library part CMP-1054-00181-1, "Common Cathode Silicon Dual Switching Diodes, 3-Pin SOT-323, Pb-Free, Tape and Reel", Manufacturer="On Semiconductor", ComponentLink1Description="Manufacturer URL", ComponentLink1URL=http://www.onsemi.com/, ComponentLink2Description=Datasheet, ComponentLink2URL=http://www.onsemi.cn/pub_link/Collateral/M1MA141WKT1-D.PDF, ComponentLink3Description="Package Specification", ComponentLink3URL=http://www.onsemi.com/pub_link/Collateral/419-04.PDF, Configuration="Common Cathode", DatasheetVersion="Rev. 9", Mounting Technology="Surface Mount", PackageDescription="3-Pin Small Outline Transistor, Body 2 x 1.25 mm, Pitch 0.65 mm", PackageReference=SOT-323-3-419-04, PackageVersion="Rev. N, 11/2008", Packing="Tape and Reel", PartNumber=M1MA142WKT1G, RoHS=TRUE, trr Max (ns)=3
D11 D12: library part CMP-02540-000045-1, "DIODE GEN PURP 100V 1A DO214AC", Capacitance=10pF, Forward Current=1A, Manufacturer=Vishay, Max Junction Temp=+150°C, Max Repetitive Reverse Voltage=100V, Max Surge Forward Current=30A, Package=95400, Peak Reverse Current=5uA, Temperature="-55°C to +150°C", Temperature Range Low=-55°C, Automotive=No, Category=Diode, ComponentLink2Description=Datasheet, ComponentLink2URL=http://www.vishay.com/docs/88586/es1.pdf, Device Class L1="Discrete Semiconductors", Device Class L2=Diodes, Device Class L3="Rectifier Diodes", Digikey Description="DIODE GEN PURP 100V 1A DO214AC", Footprint Url=https://www.vishay.com/docs/95400/sma.pdf, Height=2.29mm, Lead Free=Yes, Manufacturer Part Number=ES1B-E3/61T, Mouser Description="Diode Ultra Fast Recovery Rectifier 100V 1A 2-Pin DO-214AC T/R", Octopart=https://octopart.com/es1b-e3%2F61t-vishay-39550258, Reverse Voltage=100V, RoHS=TRUE, Standoff Height=0mm, Temperature Range High=+150°C
L1: library part CMP-02424-000275-1, "Commercial Inductors, Low DCR Series 22uH 2.9A 135mΩ 20%", Case Code (Imperial)=2525, Case Code (Metric)=6363, Current Rating=2.9A, DC Resistance (DCR)=135mR, Inductance Tolerance=20%, Max Operating Temperature=125°C, Min Operating Temperature=-55°C, Package Quantity=2000, Saturation Current=2.5A, Self Resonant Frequency=1MHz, Test Frequency=100kHz, Case/Package=2525, Contact Plating=Tin, Core Material=Ferrite, Depth=6.72mm, Height=3mm, Height - Seated (Max)=0.118inch, Inductance=22uH, Lead Free="Lead Free", Length=7.24mm, Max DC Current=2.9A, Military Standard=Not, Mount="Surface Mount", Number of Pins=2, Packaging="Tape and Reel", Radiation Hardening=No, RMS Current (Irms)=2.9A, Shielding=Shielded, Termination=SMD/SMT, Tolerance=20%, Width=0.255inch
L2 L4 L6: library part CMP-02424-000159-1, "Fixed Inductors Commercial High Saturation Series 10uH 2.3A 199mΩ 20%", Case/Package=2020, Current Rating=2.3A, DC Resistance (DCR)=199mR, Inductance Tolerance=20%, Max Operating Temperature=125°C, Min Operating Temperature=-55°C, Package Quantity=2000, Saturation Current=4A, Self Resonant Frequency=20MHz, Test Frequency=100kHz, Core Material=Ferrite, Depth=5.43mm, Height=2mm, Height - Seated (Max)=0.079inch, Inductance=10uH, Lead Free="Lead Free", Length=5.49mm, Max DC Current=2.3A, Military Standard=Not, Mount="Surface Mount", Number of Pins=2020, Packaging="Tape and Reel", Radiation Hardening=No, RMS Current (Irms)=2.3A, Shielding=Shielded, Termination=SMD/SMT, Tolerance=20%, Width=0.204inch
L5: library part CMP-0904-00027-1, "SDR0403 Series Power Inductor, 1000 uF +/- 10 %, 14 Ohm, -40 to 125 degC, 2-Pin SMD, RoHS, Tape and Reel", Inductance (uH)=1000, Manufacturer=Bourns, Temperature Range="-40 to 125 degC", Test Frequency (MHz)=0.252, Tolerance (%)="+/- 10", ComponentLink1Description="Manufacturer URL", ComponentLink1URL=http://www.bourns.com/, ComponentLink2Description=Datasheet, ComponentLink2URL=http://www.bourns.com/data/global/pdfs/sdr0403.pdf, DatasheetVersion=Feb-12, I rms (A)="0.09 Max.", I sat (A)="0.13 Typ.", Mounting Technology="Surface Mount", PackageDescription="3-Pin SMD, Dia 4.5 mm, Height 3.5 mm", PackageReference=SDR0403-2, Packing="Tape and Reel", PartNumber=SDR0403-102KL, Q=38, RDC (Ohm)="14 Max.", RoHS=TRUE, SRF (MHz)="2 Min."
LED1: library part CMP-1426-00001-1, "SMD mono-color Chip LED, WL-SMCW, Red", Color=Red, Manufacturer="Wuerth Elektronik", PartNumber=150060RS75000, ComponentLink1Description="Manufacturer URL", ComponentLink1URL=http://www.we-online.com, ComponentLink2Description=Datasheet, ComponentLink2URL=http://katalog.we-online.com/led/datasheet/150060RS75000.pdf, PackageReference=0603_A
P2: library part CMP-1502-00331-1, "SMT Male Header WR-MPC3, with THT Retention Clips, Vertical, Dual Row, pitch 3 mm, 24 pins", Contact Resistance=10mOhm, Manufacturer="Wurth Elektronik", Operating Temperature=-40to105degC, Working Voltage=250VAC, Datasheet URL=https://katalog.we-online.de/em/datasheet/6620xx235922.pdf, Gender=Male, Manufacturer URL=http://www.we-online.de, Mounting Technology=SMT, Orientation=Vertical, Package Reference=662024235922, Packaging=Tube, Part Number=662024235922, Pin Number=24, Pitch=3mm, Publisher=WurthElektronik
P3: library part CMP-1502-00403-1, "SMT Male Header WR-MPC3, with THT Rention Clips, Right Angled, Dual Row, pitch 3 mm, 16 pins", Contact Resistance=10mOhm, Manufacturer="Wurth Elektronik", Operating Temperature=-40to105degC, Working Voltage=250VAC, Datasheet URL=https://katalog.we-online.de/em/datasheet/6620xx230822.pdf, Gender=Male, Manufacturer URL=http://www.we-online.de, Mounting Technology=SMT, Orientation=RightAngled, Package Reference=662016230822, Packaging=Tube, Part Number=662016230822, Pin Number=16, Pitch=3mm, Publisher=WurthElektronik
Q1 Q3 Q4 Q5 Q6 Q7: library part CMP-1048-00736-1, "General Purpose Transistor, NPN Silicon, 3-Pin SOT-23, Pb-Free, Tape and Reel", Manufacturer="On Semiconductor", PartNumber=BC817-16LT1G, ComponentLink1Description="Manufacturer URL", ComponentLink1URL=http://www.onsemi.com/, ComponentLink2Description=Datasheet, ComponentLink2URL=http://www.onsemi.com/pub_link/Collateral/BC817-16LT1-D.PDF, ComponentLink3Description="Package Specification", ComponentLink3URL=http://www.onsemi.cn/pub_link/Collateral/318-08.PDF, DatasheetVersion="Rev. 12", fT Min (MHz)=100, IC Continuous (A)=0.5, Mounting Technology="Surface Mount", PackageDescription="3-Pin Small Outline Transistor, Body 2.92 x 1.3 mm, Pitch 0.95 mm", PackageReference=SOT-23-3-318-08, PackageVersion="Rev. AP, 11/2009", Packing="Tape and Reel", Polarity=NPN, RoHS=TRUE
Q2: library part CMP-18400-000025-1, "OPTOISO 5KV LINEAR PHVOLT 8DIPGW", Ambient Temperature Range High=+100°C, Ambient Temperature Range Low=-55°C, Forward Current=10mA, Forward Voltage=1.6V, Isolation Voltage=5000Vrms, Manufacturer=Broadcom, Max Current Transfer Ratio=0.72%, Max Junction Temp=+125°C, Min Current Transfer Ratio=0.36%, Power Dissipation=60mW, Reverse Voltage=2.5V, Temperature="-40°C to +85°C", Temperature Range High=+85°C, Temperature Range Low=-40°C, Automotive=No, Category=Trans, ComponentLink2Description=Datasheet, ComponentLink2URL=https://docs.broadcom.com/docs/AV02-0886EN, Device Class L1=Optoelectronics, Device Class L2=Optocouplers, Device Class L3=unset, Digikey Description="OPTOISO 5KV LINEAR PHVOLT 8DIPGW", Height=5mm, Ipc Land Pattern Name=DIP1100W48P254L1130H510Q8, Lead Free=Yes, Manufacturer Part Number=HCNR201-500E, Mouser Description="High Linearity Optocouplers 1 Ch 60mW 25mA", Octopart=https://octopart.com/hcnr201-500e-broadcom-71127631, Package=HCNR201-500E, RoHS=TRUE, Standoff Height=0.5mm
R1 R3 R12 R22 R23 R27 R29 R30 R32 R33 R35 R36 R39 R150: library part CMP-2001-04376-1, Manufacturer=Panasonic, Part Number=ERJ-6ENF1002V
R2 R15 R17 R28 R31 R34 R37 R40: library part CMP-2001-00045-1, Manufacturer=Panasonic, Part Number=ERJ6ENF2202V
R4: library part CMP-2001-00550-1, Manufacturer=Panasonic, Part Number=ERJ6ENF4701V
R5: library part CMP-2001-00567-1, Manufacturer=Panasonic, Part Number=ERJ6ENF6801V
R6: library part CMP-2001-00090-1, Manufacturer=Panasonic, Part Number=ERJ6ENF2701V
R7: library part CMP-1665-00004-4, "Chip Resistor, 470 Ohm, +/- 1%, 0.125 W, -55 to 155 degC, 0805 (2012 Metric), RoHS, Tape and Reel", Manufacturer=Panasonic, Max Operating Temperature="155 degC", Min Operating Temperature="-55 degC", Package Quantity=1, Voltage Rating="150 V", ComponentLink1Description="Manufacturer URL", ComponentLink1URL=http://www.panasonic.com/, ComponentLink2Description=Datasheet, ComponentLink2URL=http://industrial.panasonic.com/cdbs/www-data/pdf/RDA0000/AOA0000C86.pdf, DatasheetVersion=04/2015, Height="0.6 mm", Length="2 mm", Mount="Surface Mount", Mounting Technology="Surface Mount", PackageDescription="2-Pin Surface Mount Device, Body 2 x 1.25 mm", PackageReference=0805, Packaging="Cut Tape", Pins=2, REACH SVHC=Yes, RoHSCompliant=true
R8: library part CMP-1018-00387-1, "82R 1W 1% 2512 (6432 Metric)  SMD", Case-EIA=2512, Case-Metric=6432, Power="1 W", Tolerance="1 %", Technology=SMT
R9 R10 R11: library part CMP-2001-04377-1, Manufacturer=Panasonic, Part Number=ERJ-6ENF1003V
R13 R24 R26: library part CMP-2001-00551-1, Manufacturer=Panasonic, Part Number=ERJ6ENF4702V
R14: library part CMP-2001-04374-1, Manufacturer=Panasonic, Part Number=ERJ-6ENF1000V
R16: library part CMP-2000-05590-1, "4 mm Square Trimpot(R) Trimming Potentiometer, 5 KOhm, +/- 20%, 0.25 W, -55 to 125 degC, 3-Pin SMD, RoHS, Tape and Reel", Manufacturer=Bourns, Package=J-lead, Package Description="3-Pin Surface Mount Device, Body 4.5 x 4.5 mm, Pitch 1.15 mm", Package Reference=3314J-1, Power=250, Resistance=5, Temperature Range=-55...+125°C, Tolerance=±20%, Angle of rotation=240°, Curve=linear, Datasheet URL=http://www.bourns.com/docs/Product-Datasheets/3314.pdf, Datasheet Version=05/2016, Manufacturer URL=http://www.bourns.com/, Mounting Technology=SurfaceMount
R18 R25 R38 R41 R42: library part CMP-1665-00008-4, "Chip Resistor, 1 KOhm, +/- 1%, 0.125 W, -55 to 155 degC, 0805 (2012 Metric), RoHS, Tape and Reel", Manufacturer=Panasonic, Max Operating Temperature="155 degC", Min Operating Temperature="-55 degC", Package Quantity=1, Voltage Rating="150 V", ComponentLink1Description="Manufacturer URL", ComponentLink1URL=http://www.panasonic.com/, ComponentLink2Description=Datasheet, ComponentLink2URL=http://industrial.panasonic.com/cdbs/www-data/pdf/RDA0000/AOA0000C86.pdf, DatasheetVersion=04/2015, Height="0.6 mm", Length="2 mm", Mount="Surface Mount", Mounting Technology="Surface Mount", PackageDescription="2-Pin Surface Mount Device, Body 2 x 1.25 mm", PackageReference=0805, Packaging="Cut Tape", REACH SVHC=Yes, RoHSCompliant=true
R19: library part CMP-2001-00026-1, Manufacturer=Panasonic, Part Number=ERJ-6ENF2001V
R20: library part CMP-2001-04416-1, Manufacturer=Panasonic, Part Number=ERJ-6ENF1302V
R21: library part CMP-2001-00533-1, Manufacturer=Panasonic, Part Number=ERJ6ENF3301V
U1: library part CMP-0240-00045-1, "2.5A, Switch step-down switching regulator, 1.235 to 35V, 8-Pin HSOP", ComponentLink1Description="Manufacturer URL", ComponentLink1URL=http://www.st.com, ComponentLink2Description=Datasheet, ComponentLink2URL=http://www.st.com/internet/com/TECHNICAL_RESOURCES/TECHNICAL_LITERATURE/DATASHEET/CD00002851.pdf, DatasheetVersion=Jan-2008, PackageDescription="8-Pin Small Outline Integrated Circuit 1.27 mm Pitch", PackageReference=HSO-8, PackageVersion=2007
U2: library part CMP-0062-01638-4, "800mA Low-Dropout Linear Regulator, 4-pin SOT-223, Pb-Free", Manufacturer="Texas Instruments", PackageTopMarking=XYTT*N05A, PowerWise=N, Code_IPC=SOT223-4, Code_JEDEC=TO-261-AA, ComponentLink1Description="Datasheet URL", ComponentLink1URL=http://www.ti.com/general/docs/lit/getliterature.tsp?genericPartNumber=LM1117-N&fileType=pdf, CompType="LDO IC", High-Reliability=Y, PackageDescription="Molded SOT-223, 6.50 x 3.56 x 1.6mm Body, 4 Lead, 2.3mm Pitch", PackageReference=DCY0004A, PartNumber=LM1117MP-3.3/NOPB, PinCount=4, RoHS=Y
U3: library part CMP-2000-06569-1, "Lowest Component Count, Energy-Efficient Off-Line Switcher IC, 85 to 265 V, 220 uA, -40 to 150 degC, 7-Pin SMD, RoHS, Tube", Input voltage=85...265VAC, Manufacturer="Power Integrations", Package=SMD-8B(7-PIN), Package Description="7-Pin Surface Mount Device, Body 9.575 x 6.35 mm", Package Reference=SMD-8B-7, Datasheet URL=http://www.mouser.com/ds/2/328/lnk302_304-306-179954.pdf, Datasheet Version="Rev. J, 06/2013", Function=Regulator, Manufacturer URL=https://www.power.com/, Mounting Technology=SurfaceMount, Output type=Adjustable, Topology=Flyback
U4: library part CMP-0046-00180-2, "General Purpose 16-Bit Flash Microcontroller with USB On-The-Go, 256KB Flash, 16KB SRAM, 80-Pin TQFP, Industrial Temperature, Tape and Reel", Code_JEDEC=MS-026, ComponentLink1Description=Datasheet, ComponentLink1URL=http://ww1.microchip.com/downloads/en/DeviceDoc/39897c.pdf, ComponentLink2Description="Packaging Specification", ComponentLink2URL=http://www.microchip.com/stellent/groups/techpub_sg/documents/packagingspec/en012702.pdf, ComponentLink3Description="Microchip.com Home", ComponentLink3URL=http://www.microchip.com/, DatasheetVersion="revC, Dec-2009", PackageDescription="80-Lead Thin Plastic Quad Flat Pack (PT) - 12x12x1mm Body, 2.00mm [TQFP]", PackageReference=TQFP-PT80, PackageVersion="revBB, Aug-2009", RevisionNote="Component URLs added."
U7: library part CMP-1685-00009-1, "Dual Operational Amplifier, 3 to 32 V, 0 to 70 degC, 8-Pin SOIC (D), Green (RoHS & no Sb/Br), Tape and Reel", Code_JEDEC=MS-012, ComponentLink1Description="Manufacturer URL", ComponentLink1URL=http://www.ti.com/, ComponentLink2Description=Datasheet, ComponentLink2URL=http://www.ti.com/lit/ds/symlink/lm358.pdf, ComponentLink3Description="Package Specification", ComponentLink3URL=http://www.ti.com/lit/ml/msoi002j/msoi002j.pdf, DatasheetVersion="SLOS068T, 04/2015", PackageDescription="8-Pin Small Outline Integrated Circuit, Body 4.9 x 3.9 mm, Pitch 1.27 mm", PackageReference=D0008A, PackageVersion="4040047-3/M, 06/2011"
U8: library part CMP-0187-00365-2, "1 MHz, Low-Power Operational Amplifier, 8-Pin SOIC, Industrial Temperature", Code_IPC=SOIC127P600-8, Code_JEDEC=MS-012, ComponentLink1Description="Manufacturer URL", ComponentLink1URL=http://www.microchip.com/, ComponentLink2Description=Datasheet, ComponentLink2URL=http://ww1.microchip.com/downloads/en/DeviceDoc/21733j.pdf, ComponentLink3Description="Package Specification", ComponentLink3URL=http://www.microchip.com/stellent/groups/techpub_sg/documents/packagingspec/en012702.pdf, DatasheetVersion="revJ, Nov-2009", PackageDescription="8-Lead Plastic Small Outline (SN) - Narrow, 3.90mm Body [SOIC]", PackageReference=SOIC-SN8, PackageVersion="revBB, Aug-2009", RevisionNote="URLs added."
X1: library part CMP-2000-06123-1, "Ceramic Resonator, 12 MHz, +/- 0.5%, -40 to 125 degC, 3-Pin SMD, RoHS, Tape and Reel", Capacitance=33pF, Frequency=12MHz, Frequency Stability=±0.2%, Frequency Tolerance=±0.5%, Manufacturer=Murata, Operating Temperature=-40°C~125°C, Package / Case=3-SMD,Non-Standard, Package Description="3-Pin Surface Mount Device, Body 3.2 x 1.3 mm, Pitch 1.2 mm", Package Reference=CSTCE_G, Standard Package=1, Catalog Drawings="CSTCE-(G,V)SeriesSide2 /  / CSTCE-(G,V)SeriesTop /  / CSTCE-(G,V)SeriesSide1 /  / CSTCE-(G,V)SeriesBottom", Category=CrystalsandOscillators, Datasheet URL=http://www.murata.com/~/media/webrenewal/support/library/catalog/products/timingdevice/ceralock/p16e.ashx, Datasheet Version=12/2015, Dynamic Catalog=CERALOCK®,CSTCESeries, Family=Resonators, Features=BuiltinCapacitor, Height="0.031\"(0.80mm)", Impedance=30Ohm, Manufacturer URL=http://www.murata.com/, Mounting Technology=SurfaceMount, Mounting Type=SurfaceMount, Other Names=490-1220-6, Packaging=Digi-Reel®, Series=CERALOCK®, Size / Dimension="0.126\"Lx0.051\"W(3.20mmx1.30mm)", Type=Ceramic

## Via types
v1: diameter 19.68, hole 7.87, Top Layer to Bottom Layer, 4 vias

## Nets (pads, with @x,y where several pads share a name; then routed paths per layer and width w, separated by ;. In a path a pad name is that pad's centre, name@x,y a point inside that pad or via, vN(x,y) a via of type N, cw(c..) or ccw(c..) an arc to the next point about the centre after c; other vN are vias at no path point)
+3V3: D10.3 R29.1 R32.1 R35.1 U8.8
+3V3D: R3.2
+5: D11.2
+12: C28.1 C29.2 C30.1 D3.2 D7.2 D8.1 Q2.3 R19.1 R21.2 U3.1 U3.2 U3.7 U3.8 U7.8
D+3V3: C13.2 C14.2 U2.2 U2.4
D+5: C5.2 C6.2 C7.2 C8.2 L1.2 L2.1 L4.1 L6.1 R5.2 R7.2
GND: BR1.2 C1.2 C2.2 C3.1 C5.1 C6.1 C7.1 C8.1 C9.2 C10.1 C11.1 C12.1 C13.1 C14.1 C15.2 C16.1 C17.1 C18.1 C19.2 C20.1 C21.1 C22.1 C23.1 C24.1 C25.1 C31.1 D4.1 D9.3 LED1.1 Q1.2 Q2.1 Q2.6 Q3.2 Q4.2 Q5.2 Q6.2 Q7.2 R2.1 R4.1 R6.1 R12.1 R13.2 R17.2 R24.2 R28.2 R31.2 R34.2 R37.2 R40.2 U1.3 U1.7 U1.9 U2.1 U7.4 U8.4 X1.2
  other v1: 4379.92,2885.83 4342.52,2933.07 4417.32,2933.07 4379.92,2980.31
LEM+5: C15.1 C16.2 C17.2 C18.2 L6.2
NetBR1_1: BR1.1 C1.1 D1.2 D2.3
NetBR1_3: BR1.3
NetBR1_4: BR1.4
NetC2_1: C2.1 D1.1 D3.1 U1.8
NetC3_2: C3.2 C4.2 U1.4
NetC4_1: C4.1 R4.2
NetC9_1: C9.1 C10.2 C11.2 C12.2 L2.2 U2.3
NetC23_2: C23.2 R11.1 R12.2 U7.3
NetC24_2: C24.2 R16.2 U8.3
NetC25_2: C25.2 R18.2
NetC26_1: C26.1 D6.1 L5.1
NetC26_2: C26.2 C27.2 C30.2 D5.2 D8.2 R21.1
NetC27_1: C27.1 L5.2 U3.5
NetC28_2: C28.2 U3.3
NetC29_1: C29.1 D7.1 R20.2
NetC31_2: C31.2 R25.1
NetD2_1: D2.1 R1.2
NetD4_2: D4.2 L1.1 U1.1
NetD5_1: D5.1
NetD6_2: D6.2 R8.2
NetD9_1: D9.1 D10.1 R23.1 R24.1 U8.5
NetD9_2: D9.2 D10.2 R22.1 R26.1 U8.6
NetD11_1: D11.1 R42.2
NetLED1_2: LED1.2 R7.1
NetQ1_1: Q1.1 R1.1 R2.2
NetQ1_3: Q1.3 R3.1
NetQ2_2: Q2.2 R14.2
NetQ2_4: Q2.4 R13.1 U7.2
NetQ2_5: Q2.5 R15.2
NetQ3_1: Q3.1 R27.1 R28.1
NetQ3_3: Q3.3 R29.2
NetQ4_1: Q4.1 R30.1 R31.1
NetQ4_3: Q4.3 R32.2
NetQ5_1: Q5.1 R33.1 R34.1
NetQ5_3: Q5.3 R35.2
NetQ6_1: Q6.1 R36.2 R37.1
NetQ6_3: Q6.3 R38.1
NetQ7_1: Q7.1 R39.2 R40.1
NetQ7_3: Q7.3 R41.1
NetR5_1: R5.1 R6.2 U1.5
NetR8_1: R8.1 R9.1
NetR9_2: R9.2 R10.1
NetR10_2: R10.2 R11.2
NetR14_1: R14.1 U7.1
NetR15_1: R15.1 R16.3
NetR16_1: R16.1 R17.1
NetR18_1: R18.1 U8.1 U8.2
NetR19_2: R19.2 R20.1 U3.4
NetR25_2: R25.2 R26.2 U8.7
NetR36_1: R36.1
NetR39_1: R39.1
NetU4_49: U4.49 X1.3
NetU4_50: U4.50 X1.1
W+3V3: C19.1 C20.2 C21.2 C22.2 L4.2
pads on no net: C100.1 C100.2 C101.1 C101.2 C102.1 C102.2 C103.1 C103.2 C104.1 C104.2 D2.2 D12.1 D12.2 P2.1 P2.2 P2.3 P2.4 P2.5 P2.6 P2.7 P2.8 P2.9 P2.10 P2.11 P2.12 P2.13 P2.14 P2.15 P2.16 P2.17 P2.18 P2.19 P2.20 P2.21 P2.22 P2.23 P2.24 P2.MH1 P2.MH2 P3.1 P3.2 P3.3 P3.4 P3.5 P3.6 P3.7 P3.8 P3.9 P3.10 P3.11 P3.12 P3.13 P3.14 P3.15 P3.16 P3.MH1 P3.MH2 Q2.7 Q2.8 R22.2 R23.2 R27.2 R30.2 R33.2 R38.2 R41.2 R42.1 R150.1 R150.2 U1.2 U1.6 U4.1 U4.2 U4.3 U4.4 U4.5 U4.6 U4.7 U4.8 U4.9 U4.10 U4.11 U4.12 U4.13 U4.14 U4.15 U4.16 U4.17 U4.18 U4.19 U4.20 U4.21 U4.22 U4.23 U4.24 U4.25 U4.26 U4.27 U4.28 U4.29 U4.30 U4.31 U4.32 U4.33 U4.34 U4.35 U4.36 U4.37 U4.38 U4.39 U4.40 U4.41 U4.42 U4.43 U4.44 U4.45 U4.46 U4.47 U4.48 U4.51 U4.52 U4.53 U4.54 U4.55 U4.56 U4.57 U4.58 U4.59 U4.60 U4.61 U4.62 U4.63 U4.64 U4.65 U4.66 U4.67 U4.68 U4.69 U4.70 U4.71 U4.72 U4.73 U4.74 U4.75 U4.76 U4.77 U4.78 U4.79 U4.80 U7.5 U7.6 U7.7